# Altium PCB PCB_SATA_SFP.PcbDoc
Units mil, origin at the board's own origin, x right, y up, seen from the top; angles counter-clockwise.
Board outline 2874.02 x 708.66 mil, 4 copper layers (Top Layer, MidPlane_1, MidPlane_2, Bottom Layer), stack 61.899 mil thick; 37 components, 22 nets, 140 pads, 63 vias.
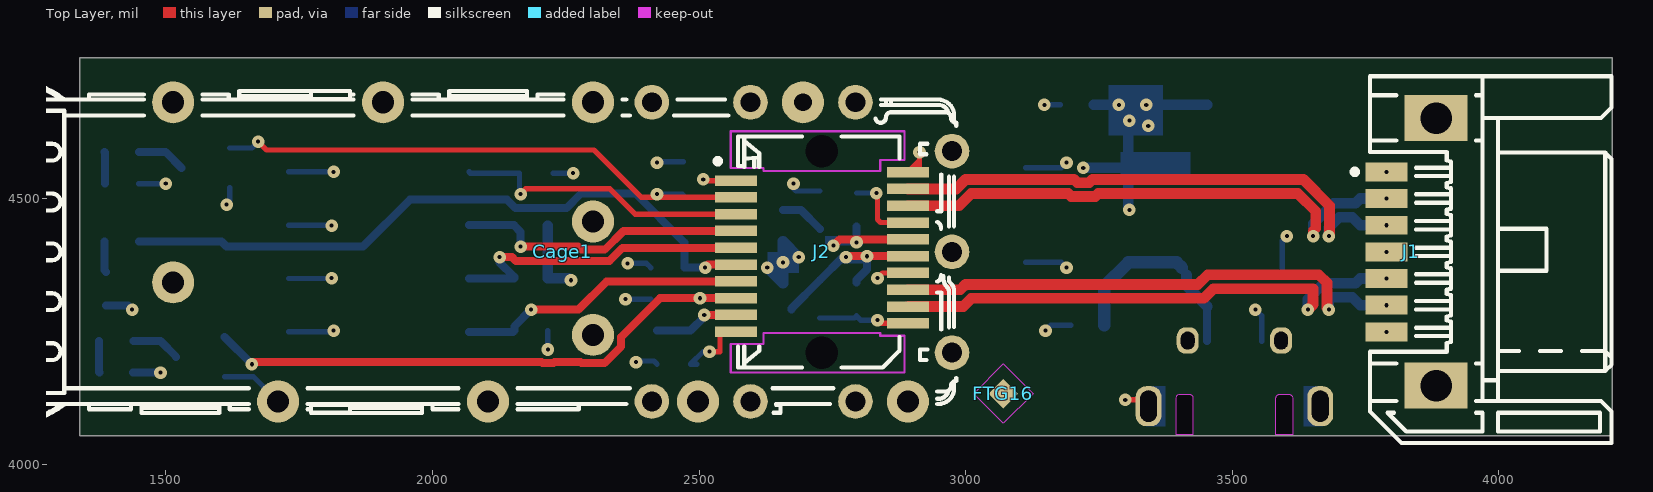
[diagram p0: Top Layer view]
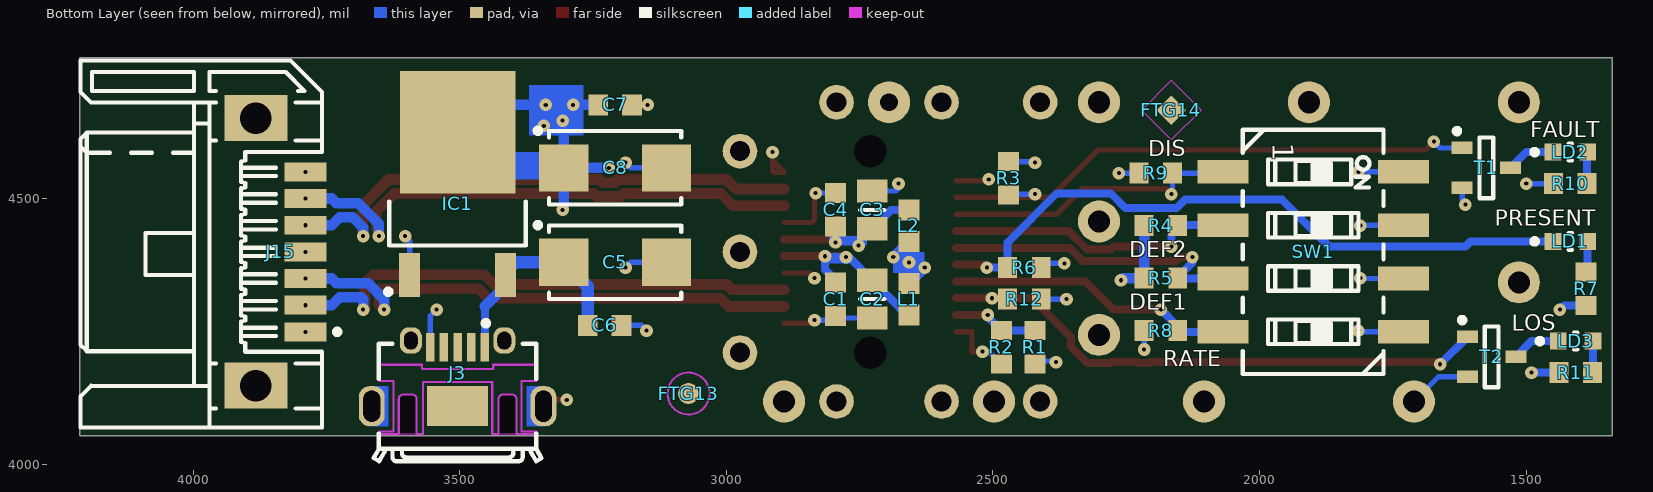
[diagram p1: Bottom Layer view, seen from below]
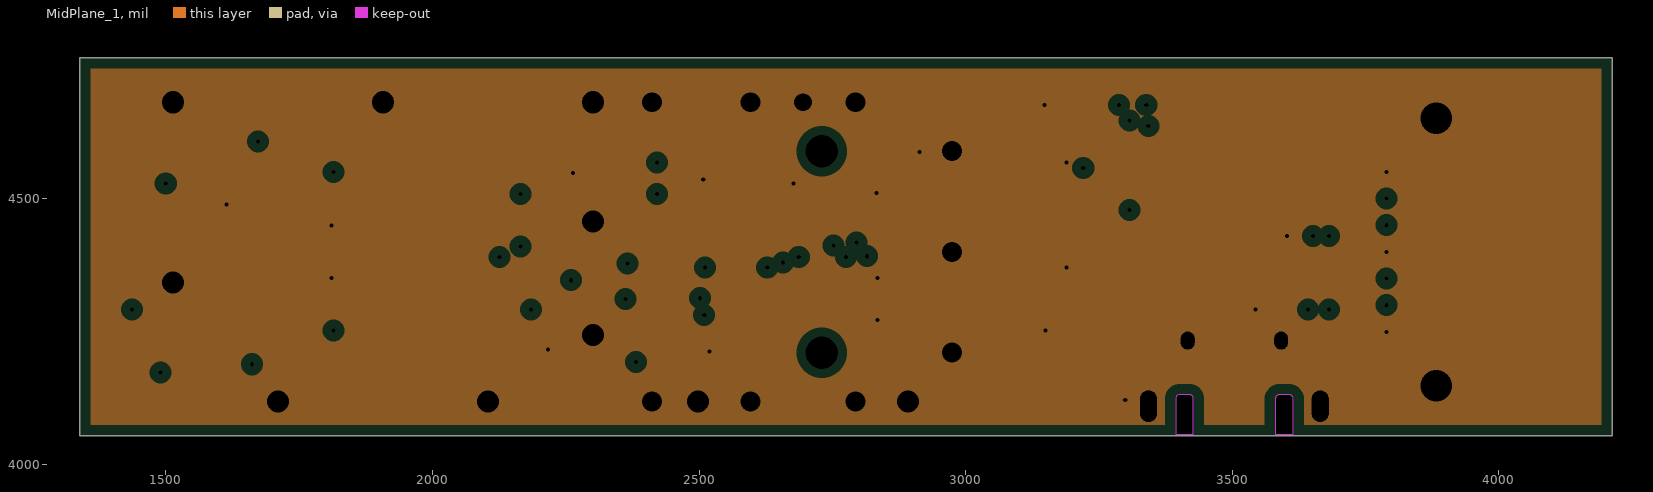
[diagram p2: MidPlane_1, clearances drawn from the general rule]
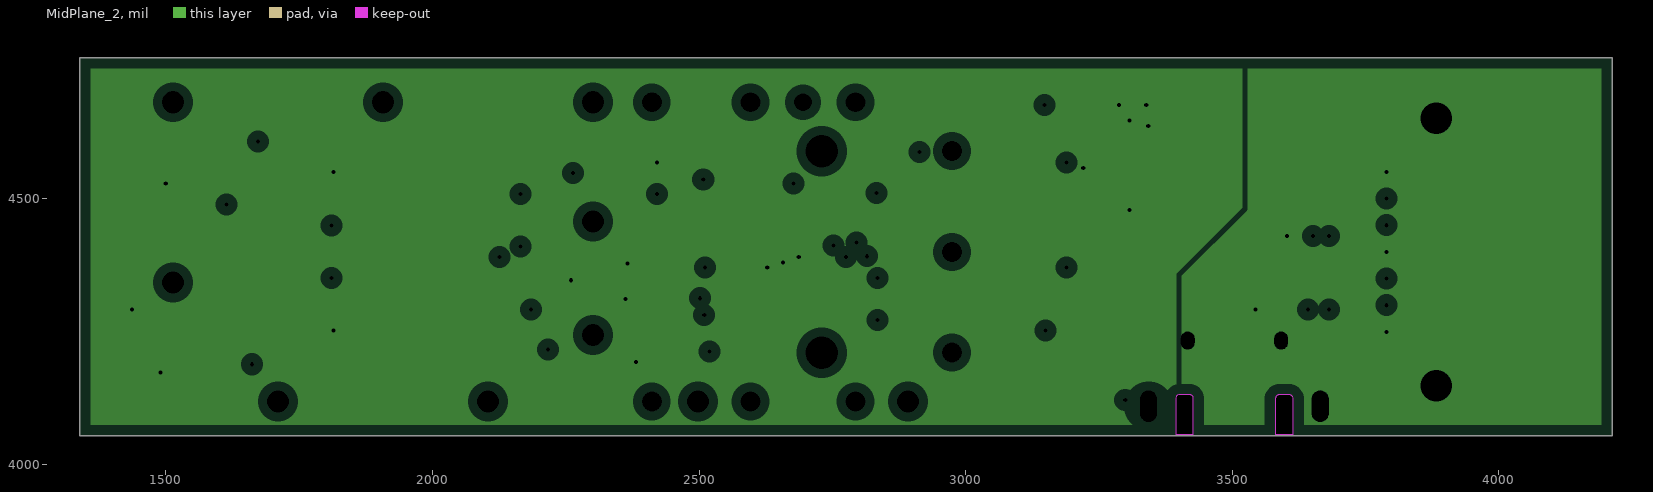
[diagram p3: MidPlane_2, clearances drawn from the general rule]
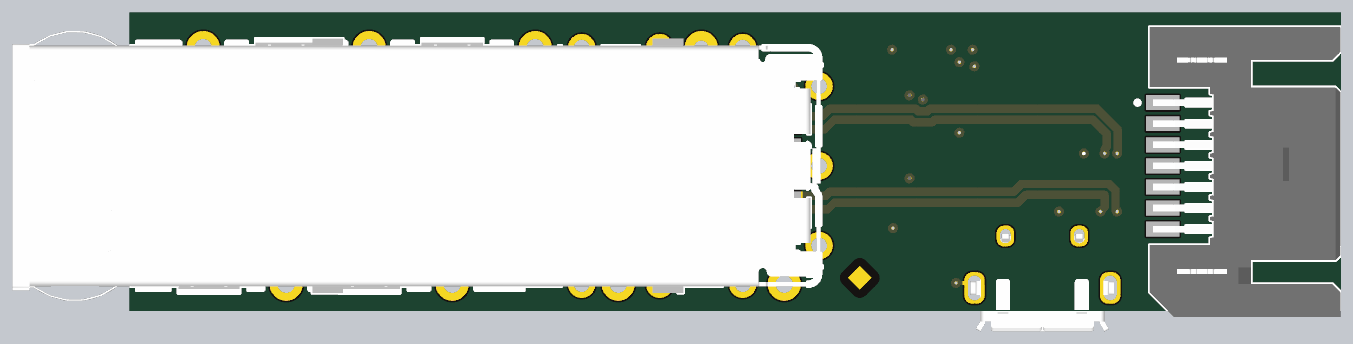
[diagram p4: 3D render of the assembled board from above, using the file's embedded part models]
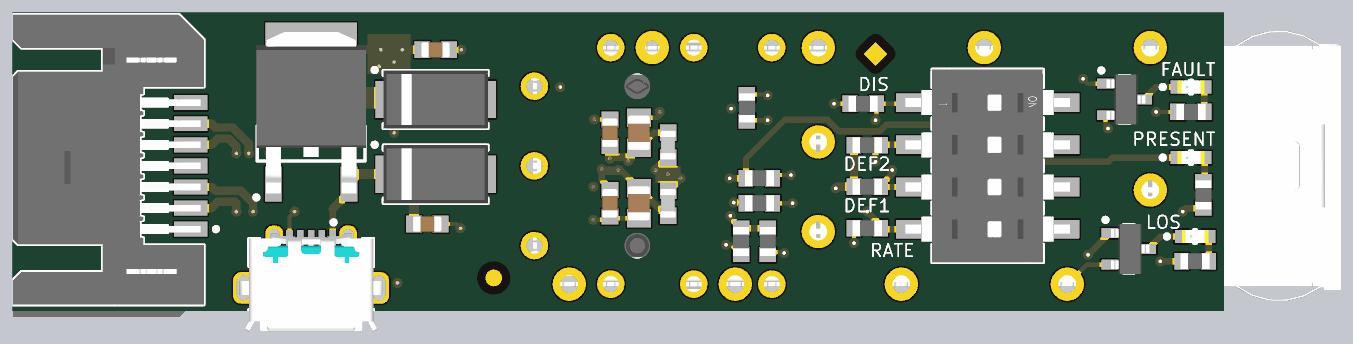
[diagram p5: 3D render of the assembled board from below, using the file's embedded part models]

## Layer stack, top to bottom
Top Solder: solder mask 0.4, Solder Resist, Dk 3.5
Top Layer: signal copper 1.4
Dielectric1: prepreg 14.1732, FR-4, Dk 4.8
MidPlane_1: plane copper 1.4, net GND
Dielectric3: core 27.9528, FR-4, Dk 4.8
MidPlane_2: plane copper 1.4, net (Multiple Nets)
Dielectric2: prepreg 14.1732, FR-4, Dk 4.8
Bottom Layer: signal copper 1.4
Bottom Solder: solder mask 0.4, Solder Resist, Dk 3.5

## Board outline
1338.58,4055.12 4212.6,4055.12 4212.6,4763.78 1338.58,4763.78

## Design rules (kind name [scope] priority, off if disabled: settings)
Clearance Clearance_KO [OnLayer('Keep-Out Layer')] p1: gap=10 ignorepadtopadclearanceinfootprint=FALSE except(0: Arc-Hole Track-Hole SMDPad-Hole THPad-Hole Via-Hole Fill-Hole Poly-Hole Region-Hole Text-Hole)
Clearance Clearance_Poly_DS [(InDifferentialPairClass('All Differential Pairs')) vs InPolygon] p2: gap=40 ignorepadtopadclearanceinfootprint=FALSE except(0: Arc-Hole Track-Hole SMDPad-Hole THPad-Hole Via-Hole Fill-Hole Poly-Hole Region-Hole Text-Hole)
Clearance Clearance_Poly [InPolygon] p3: gap=11.81 ignorepadtopadclearanceinfootprint=FALSE except(0: Arc-Hole Track-Hole SMDPad-Hole THPad-Hole Via-Hole Fill-Hole Poly-Hole Region-Hole Text-Hole)
Clearance [All] p4: gap=6 ignorepadtopadclearanceinfootprint=FALSE except(0: Arc-Hole Track-Hole SMDPad-Hole THPad-Hole Via-Hole Fill-Hole Poly-Hole Region-Hole Text-Hole; 15: Arc-Poly Track-Poly SMDPad-Poly THPad-Poly Via-Poly Fill-Poly Poly-Poly)
DiffPairsRouting [All] p1 off: maxlimit=6 minlimit=6 mostfreqgap=6 toplayer_minwidth=15 toplayer_maxwidth=15 toplayer_prefwidth=15 bottomlayer_minwidth=15 bottomlayer_maxwidth=15 bottomlayer_prefwidth=15 maxuncoupledlength=500
HoleSize [All] p1: absolutevalues=TRUE maxlimit=472.44 minlimit=1 maxpercent=80.000 minpercent=20.000
MinimumSolderMaskSliver [All] p1: minsoldermaskwidth=0
PlaneClearance [All] p1: clearance=16.73
PlaneConnect PlaneConnect_Via [IsVia] p1: planeconnectstyle=Direct reliefexpansion=20 reliefentries=4 reliefconductorwidth=10 reliefairgap=10
PlaneConnect [All] p2: planeconnectstyle=Relief reliefexpansion=10 reliefentries=4 reliefconductorwidth=10 reliefairgap=10
PolygonConnect PolygonConnect_Via [IsVia] p1: connectstyle=Direct reliefconductorwidth=10 reliefentries=4 polygonreliefangle="90 Angle" airgapwidth=10
PolygonConnect [All] p2: connectstyle=Relief reliefconductorwidth=10 reliefentries=4 polygonreliefangle="90 Angle" airgapwidth=10
RoomDefinition PCB_SATA_SFP [InComponentClass('PCB_SATA_SFP')] p1: confinementstyle=ConfineIn formatcopy=TRUE lockcomponents=FALSE outline -6375.21,3085.88 -4059.86,3085.88 -4059.86,3726.04 -6375.21,3726.04
RoutingVias [All] p1: holewidth=7.87 width=23.62 viastyle="Through Hole" minholewidth=7.87 minwidth=23.62 maxholewidth=23.62 maxwidth=47.24
SilkToSilkClearance [All] p1: silktosilkclearance=6
SilkToSolderMaskClearance SilkscreenOverComponentPads [IsPad] p1: minsilkscreentomaskgap=0 clearancetoexposedcopper=TRUE
SolderMaskExpansion [All] p1: expansion=4
Width Width_DS [(InDifferentialPairClass('All Differential Pairs'))] p1: maxlimit=12 minlimit=6 preferedwidth=12
Width [All] p2: maxlimit=23.54 minlimit=6 preferedwidth=23.54 minimp=50.000000 maximp=50.000000 favimp=50.000000
23 further rules are at their usual default settings.

## Classes and differential pairs
net class Diff_100Ohm: RD_N RD_P TD_N TD_P
differential pair TD: +TD_P -TD_N
differential pair RD: +RD_P -RD_N

## Components (designator, comment, footprint, x,y, rotation, side; value= is the part's Value field where it differs from the comment)
C1 "100nF" CAPC1608X87N 2795.28,4311.02 r90 bottom
C2 "10uF" CAPC2012X95N 2726.38,4311.02 r90 bottom
C3 "10uF" CAPC2012X95N 2726.38,4478.35 r270 bottom
C4 "100nF" CAPC1608X87N 2795.28,4478.35 r270 bottom
C5 "10uF" CAPMP6032X280N 3208.66,4379.92 r180 bottom
C6 "100nF" CAPC1608X87N 3228.35,4261.81 r0 bottom
C7 "100nF" CAPC1608X87N 3208.66,4675.2 r0 bottom
C8 "10uF" CAPMP6032X280N 3208.66,4557.09 r180 bottom
Cage1 "SFP+" TYCO_2007198-1 2730.31,4399.61 r0 top
FTG13 "Use only in PCB" FIDUCIAL_TOP_C100-200 3070.87,4133.86 r90 bottom
FTG14 "Use only in PCB" FIDUCIAL_TOP_S100-200 2165.35,4665.35 r90 bottom
FTG16 "Use only in PCB" FIDUCIAL_TOP_S100-200 3070.87,4133.86 r90 top
IC1 "LD1117DT33CTR" TO228P972X240-3N-R540X510 3503.94,4527.56 r90 bottom
J1 "SATA" 3M_5607-4200-SH 3789.37,4399.61 r90 top
J2 "SFP" TYCO_1367073-1 2730.31,4399.61 r0 top
J3 "Micro-USB AB 2.0" HIROSE_ZX62RD-AB-5P8 3503.94,4220.47 r180 bottom
J15 "SATA" 3M_5607-4200-SH 3789.37,4399.61 r270 bottom
L1 "120R@100MHz" INDC1608X65N 2657.48,4311.02 r270 bottom
L2 "120R@100MHz" INDC1608X65N 2657.48,4448.82 r90 bottom
LD1 "Green" LED_KINGBRIGHT_KPH-1608CGCK 1417.32,4419.29 r180 bottom
LD2 "Green" LED_KINGBRIGHT_KPH-1608CGCK 1417.32,4586.61 r180 bottom
LD3 "Green" LED_KINGBRIGHT_KPH-1608CGCK 1407.48,4232.28 r180 bottom
R1 "10k" RESC1608X55N 2421.26,4220.47 r270 bottom
R2 "0" RESC1608X55N 2484.25,4220.47 r90 bottom
R3 "10k" RESC1608X55N 2470.47,4537.4 r90 bottom
R4 "10k" RESC1608X55N 2185.04,4448.82 r0 bottom
R5 "10k" RESC1608X55N 2185.04,4350.39 r0 bottom
R6 "10k" RESC1608X55N 2440.94,4370.08 r180 bottom
R7 "240" RESC1608X55N 1387.8,4330.71 r270 bottom
R8 "10k" RESC1608X55N 2185.04,4251.97 r180 bottom
R9 "10k" RESC1608X55N 2194.88,4547.24 r180 bottom
R10 "240" RESC1608X55N 1417.32,4527.56 r0 bottom
R11 "240" RESC1608X55N 1407.48,4173.23 r0 bottom
R12 "10k" RESC1608X55N 2440.94,4311.02 r180 bottom
SW1 "Switch" SW_CTS_219-4MST 1899.61,4399.61 r180 bottom
T1 "BSH103" SOT95P230X110-3N 1574.8,4557.09 r180 bottom
T2 "BSH103" SOT95P230X110-3N 1564.96,4202.76 r180 bottom

## Footprints (in the part's own frame and the unit in brackets; to place one, negate y for a bottom-side part, rotate by r counter-clockwise, add the part's x,y. Pads: shape width x height; smd on the part's side, far side on the other; paste and mask are expansions set on the pad)
3M_5607-4200-SH [mm] "1.27mm (.050\") Pitch, Surface Mount, Right Angle, Serial ATA Plug (SATA)"
  rect 0.9x2 smd: 1(3.81,0) 2(2.54,0) 3(1.27,0) 4(0,0) 5(-1.27,0) 6(-2.54,0) 7(-3.81,0)
  rect 2.2x3 hole 1.5: 8(-6.37,-2.36) 8(6.37,-2.36)
  silkscreen extent -9.11,-10.71 8.36,1.64, body extent -9.11,-10.71 8.36,0.79, height 4
CAPC1608X87N [mm] "Chip Capacitor, Body 1.6x0.8mm IPC Medium Density"
  rect 0.95x1 smd: 1(-0.8,0) 2(0.8,0)
  body extent -0.87,-0.47 0.88,0.48, height 0.87
CAPC2012X95N [mm] "Chip Capacitor, Body 2.0x1.25mm, IPC Medium Density"
  rect 1.1x1.45 smd: 1(-0.9,0) 2(0.9,0)
  silkscreen extent 0,-0.58 0,0.58, body extent -1.05,-0.67 1.05,0.68, height 0.95
CAPMP6032X280N [mm] "Capacitor, Polarized, Molded  Body 6.0x3.2mm, IPC Medium Density"
  rect 2.35x2.25 smd: 1(-2.45,0) 2(2.45,0)
  silkscreen extent -3.8,-1.75 3.15,1.9, body extent -3.15,-1.75 3.15,1.75, height 2.8
FIDUCIAL_TOP_C100-200 [mm] "Round Fiducial Target, Top Layer, 1.0mm, Top Solder 2.0mm, Keepout =2.0mm"
  round 1 smd paste-0.51 mask+0.5: FTG2(0,0)
  Top Layer keep-out circle w0.1: c0,0 r1
FIDUCIAL_TOP_S100-200 [mm] "Square Fiducial Target, Top Layer, 1.0mm, Top Solder 2.0mm, Keepout =2.0mm"
  rect 1x1 smd rot 45 paste-0.51 mask+0.5: 1(0,0)
  Top Layer keep-out region: 1.414,0 0,-1.414 -1.414,0 0,1.414
HIROSE_ZX62RD-AB-5P8 [mm] "Right Angle, SMD Micro-USB Type AB - Reverse (Top mount), Shell Through Hole"
  rect 0.4x1.35 smd: 1(1.3,0) 2(0.65,0) 3(0,0) 4(-0.65,0) 5(-1.3,0)
  rrect80% 1.225x1.9 hole 0.8 slot 1.5 at 90 deg: 6(-4.088,-2.8) 6(4.088,-2.8)
  rrect80% 1.05x1.25 hole 0.65 slot 0.85 at 90 deg: 6(-2.225,0.325) 6(2.225,0.325)
  rect 2.9x1.9 smd: PastePad(0,-2.8)
  Top Layer region: 4.2,-3.75 4.2,-1.85 3.3,-1.85 3.3,-1.85 3.3,-3.75
  Top Layer region: -4.2,-1.85 -4.2,-3.75 -3.3,-3.75 -3.3,-3.75 -3.3,-1.85
  Top Layer keep-out lines w0.1: 3.75,-4.125 2.8,-4.125 2.8,-2.45 ccw(c2.6,-2.45) 2.6,-2.25 2.15,-2.25 ccw(c2.15,-2.45) 1.95,-2.45 1.95,-4.125 1.65,-4.125 1.65,-1.65 -1.65,-1.65 -1.65,-4.125 -1.95,-4.125 -1.95,-2.45 ccw(c-2.15,-2.45) -2.15,-2.25 -2.6,-2.25 ccw(c-2.6,-2.45) -2.8,-2.45 -2.8,-4.125 -3.75,-4.125 -3.75,-4 -3.05,-4 -3.05,-1.6 -3.75,-1.6 -3.75,-0.825 -1.7,-0.825 -1.7,-1.025 1.7,-1.025 1.7,-0.825 3.75,-0.825 3.75,-1.6 3.05,-1.6 3.05,-4 3.75,-4 3.75,-4.125
  Keep-Out Layer board cut-out: -2.8,-4.125 -2.8,-2.45 -2.785,-2.373 -2.741,-2.309 -2.676,-2.265 -2.6,-2.25 -2.6,-2.25 -2.15,-2.25 -2.073,-2.265 -2.009,-2.309 -1.965,-2.373 -1.95,-2.45 -1.95,-2.45 -1.95,-4.125
  Keep-Out Layer board cut-out: 1.95,-4.125 1.95,-2.45 1.965,-2.373 2.009,-2.309 2.074,-2.265 2.15,-2.25 2.15,-2.25 2.6,-2.25 2.677,-2.265 2.741,-2.309 2.785,-2.373 2.8,-2.45 2.8,-2.45 2.8,-4.125
  silkscreen extent -4,-5.42 4,1.27, body extent -4.32,-5.42 4.33,0.47, height 2.78
INDC1608X65N [mm] "Chip Inductor, 2-Leads, EIA 0603, Metric 1608, Body 1.6x0.8mm, IPC Medium Density"
  rect 1x1 smd: 1(-0.75,0) 2(0.75,0)
  body extent -0.87,-0.47 0.88,0.48, height 0.65
LED_KINGBRIGHT_KPH-1608CGCK [mm] "SMT Green LED, Case 0603, Body L 1.6 x W 0.8mm H 0.65mm"
  rect 0.8x0.8 smd: 1(-0.825,0) 2(0.825,0)
  silkscreen extent -1.83,-0.4 0.08,0.4, body extent -0.8,-0.4 0.8,0.4, height 0.65
RESC1608X55N [mm] "Chip Resistor, EIA 0603, Metric 1608, Body 1.6x0.8mm, IPC Medium Density"
  rect 0.9x1 smd: 1(-0.8,0) 2(0.8,0)
  body extent -0.87,-0.47 0.88,0.48, height 0.55
SOT95P230X110-3N [mm] "SOT23, 3 pin, Pitch 0.95mm - 1.3mm W X 2.9mm L X 1.1mm H, IPC Medium Density"
  rect 1x0.6 smd: 1(-1.15,0.95) 2(-1.15,-0.95) 3(1.15,0)
  silkscreen extent -1.53,-1.45 0.33,1.87, body extent -1.08,-1.5 1.25,1.5, height 1.1
SW_CTS_219-4MST [mm] "Pitch 2.54mm, Body 6.7 x 11.63mm, 4 Ways SPST Surface-Mounting DIP Switch, CTS 219 Series"
  rect 2.44x1.13 smd: 1(-4.3,3.81) 2(-4.3,1.27) 3(-4.3,-1.27) 4(-4.3,-3.81) 5(4.3,-3.81) 6(4.3,-1.27) 7(4.3,1.27) 8(4.3,3.81)
  silkscreen extent -3.35,-5.82 3.35,5.82, body extent -4.95,-5.81 4.96,5.82, height 4.3
TO228P972X240-3N-R540X510 [mm] "DPAK TO-252, 2.28mm pitch; 2 pin, 9.725mm L X 6.10mm W X 2.40mm H body, IPC Medium Density"
  rect 2.1x1 smd: 1(-4.35,2.28) 2(-4.35,-2.28)
  rect 5.85x5.5 smd: 3(2.45,0)
  silkscreen extent -5.27,-3.25 -0.85,3.43, body extent -4.9,-3.3 4.82,3.3, height 2.4
TYCO_1367073-1 [mm] "20 Position, Pitch 0.8mm SFP Receptacle (Small Form-factor Pluggable)"
  rect 2x0.5 smd: 1(-4.1,3.395) 2(-4.1,2.595) 3(-4.1,1.795) 4(-4.1,0.995) 5(-4.1,0.195) 6(-4.1,-0.605) 7(-4.1,-1.405) 8(-4.1,-2.205) 9(-4.1,-3.005) 10(-4.1,-3.805) 11(4.1,-3.405) 12(4.1,-2.605) 13(4.1,-1.805) 14(4.1,-1.005) 15(4.1,-0.205) 16(4.1,0.595) 17(4.1,1.395) 18(4.1,2.195) 19(4.1,2.995) 20(4.1,3.795)
  round 0.5 hole 1.55 unplated mask+0.525: MTG1(0,4.795) MTG2(0,-4.805)
  Top Layer keep-out lines w0.1: -4.34,-5.755 -4.34,-4.395 -2.78,-4.395 -2.78,-3.855 2.78,-3.855 2.78,-3.995 3.94,-3.995 3.94,-4.805 3.94,-5.755 -4.34,-5.755 ; -4.34,3.985 -4.34,5.745 3.94,5.745 3.94,4.385 2.78,4.385 2.78,3.845 -2.78,3.845 -2.78,3.985 -4.34,3.985
  silkscreen extent -5.08,-5.51 3.7,5.5, body extent -4.5,-5.5 4.5,5.5, height 5.22
TYCO_2007198-1 [mm] "SFP+ 1x1 Press Fit Cage"
  round 2 hole 1.05: 1(-30.9,7.125) 2(-20.9,7.125) 3(-10.9,7.125) 4(-10.9,1.445) 5(-30.9,-1.455) 6(-10.9,-3.955) 7(-25.9,-7.125) 8(-15.9,-7.125) 9(-5.9,-7.125) 10(4.1,-7.125)
  round 1.65 hole 0.95: 11(-8.1,7.125) 12(-3.4,7.125) 13(1.6,7.125) 14(6.2,4.8) 15(6.2,0) 16(6.2,-4.8) 17(-8.1,-7.125) 18(-3.4,-7.125) 19(1.6,-7.125)
  round 2 hole 0.85: 20(-0.9,7.125)
  silkscreen extent -42.4,-8.15 6.4,8.15, body extent -42.4,-8.15 6.4,8.15, height 10.6

## Part data
C1 C4 C6 C7: library part CC0603_100NF_50V_10%_X5R, "Non-polarised capacitor", Case=0603, Manufacturer=GENERIC, Manufacturer1 ComponentHeight=0.9mm, Manufacturer1 Example=TDK, Manufacturer1 Part Number=C1608X5R1H104K080AA, Tolerance=±10%, Voltage=50V, Author="CERN DEM MR", Component Type=Standard, CreateDate=08.01.2016, HelpURL=\\cern.ch\dfs\Applications\Altium\Datasheets\CC0603_X5R_TDK_C.pdf, LatestRevisionDate=08.01.2016, Manufacturer Part Number=CC0603_100NF_50V_10%_X5R, Mounted=Yes, Part Description="SMD Multilayer Chip Ceramic Capacitor", Part Number=CC0603_100NF_50V_10%_X5R, Pin Count=2, Sense=No, SMD=Yes, Socket=No, Status=None, TC=X5R
C2 C3: library part CC0805_10UF_25V_10%_X5R, "Non-polarised capacitor", Case=0805, Manufacturer=GENERIC, Manufacturer1 ComponentHeight=0.95mm, Manufacturer1 Example=MURATA, Manufacturer1 Part Number=GRM219R61E106KA12D, Tolerance=±10%, Voltage=25V, Author="CERN DEM JLC", Component Type=Standard, CreateDate=25.10.2012, HelpURL=\\cern.ch\dfs\Applications\Altium\Datasheets\CC0805_X5R_MURATA_GRM.pdf, LatestRevisionDate=06.09.2016, Manufacturer Part Number=CC0805_10UF_25V_10%_X5R, Mounted=Yes, Part Description="SMD Multilayer Chip Ceramic Capacitor", Part Number=CC0805_10UF_25V_10%_X5R, Pin Count=2, Sense=No, SMD=Yes, Socket=No, Status=Preferred, TC=X5R
C5 C8: library part CTE6032-28_10UF_25V_10%_LESR0300, "Polarised capacitor", Case=C, Manufacturer=GENERIC, Manufacturer1 ComponentHeight=2.8mm, Manufacturer1 Example="VISHAY SPRAGUE", Manufacturer1 Part Number=TR3C106K025C0300, Tolerance=±10%, Voltage=25V, Author="CERN DEM JLC", Component Type=Standard, CreateDate=30.08.2011, HelpURL=\\cern.ch\dfs\Applications\Altium\Datasheets\CTE_VISHAY_TR3.pdf, LatestRevisionDate=30.08.2011, Manufacturer Part Number=CTE6032-28_10UF_25V_10%_LESR0300, Mounted=Yes, Part Description="Low ESR 0R3 Solid Tantalum Chip Capacitor", Part Number=CTE6032-28_10UF_25V_10%_LESR0300, Pin Count=2, Sense=No, SMD=Yes, Socket=No, Status=Preferred
Cage1: library part TYCO_2007198-1, "SFP+ 1x1 Cage (20Pins)", Manufacturer="TYCO ELECTRONICS", Manufacturer Part Number=2007198-1, Author="CERN DEM JLC", ClassName=Connectors, ComponentHeight=9.7mm, Component Type=Standard, CreateDate=04.06.2013, Family=SFP+, HelpURL=\\cern.ch\dfs\Applications\Altium\Datasheets\TYCO_2007198-1.pdf, LatestRevisionDate=12.06.2013, Mounted=Yes, Part Description="1x1 Press Fit Cage For Use with SFP+ Connector (Small Form-factor Pluggable)", Part Number=TYCO_2007198-1, Pin Count=20, PressFit=Yes, Sense=No, SMD=No, Socket=No, Status=None
FTG13: library part FIDUCIAL_TARGET_C100-200, "Fiducial Target", Author="CERN DEM JLC", ComponentHeight=0mm, Component Type="Standard (No BOM)", CreateDate=09.02.2010, Family=Fiducial, HelpURL=Undefined, LatestRevisionDate=04.04.2012, Mounted=No, PackageDescription="Round Fiducial Target, Top Layer, 1.0mm, Top Solder 2.0mm, Keepout =2.0mm", Part Description="Round Fiducial Target, Top Layer, 1.0mm, Top Solder 2.0mm, Keepout =2.0mm", Part Number=FIDUCIAL_TARGET_C100-200, Pin Count=1, Sense=No, SMD=Yes, Socket=No, Status=None
FTG14 FTG16: library part FIDUCIAL_TARGET_S100-200, "Fiducial Target", Author="CERN DEM JLC", ComponentHeight=0mm, Component Type="Standard (No BOM)", CreateDate=09.02.2010, Family=Fiducial, HelpURL=Undefined, LatestRevisionDate=04.04.2012, Mounted=No, PackageDescription="Square Fiducial Target, Top Layer, 1.0mm, Top Solder 2.0mm, Keepout =2.0mm", Part Description="Square Fiducial Target, Top Layer, 1.0mm, Top Solder 2.0mm, Keepout =2.0mm", Part Number=FIDUCIAL_TARGET_S100-200, Pin Count=1, Sense=No, SMD=Yes, Socket=No, Status=None
IC1: "3-Terminal Regulator 1=GND 2=IN 3=OUT", Case=DPAK, Manufacturer="ST MICROELECTRONICS", Author="CERN DEM JLC", Bonding=No, ComponentHeight=2.4mm, Component Type=Standard, CreateDate=08.06.2011, Device=LD1117DT33CTR, HelpURL=\\cern.ch\dfs\Applications\Altium\Datasheets\LD1117DT33CTR.pdf, LatestRevisionDate=08.06.2011, Manufacturer Part Number=LD1117DT33CTR, Mounted=Yes, PackageDescription="DPAK TO-252, 2.28mm pitch; 2 pin, 9.725mm L X 6.10mm W X 2.40mm H body, IPC Medium Density", Part Description="3.3V 800mA Low drop fixed and adjustable positive voltage regulators", Part Number=LD1117DT33CTR, Pin Count=3, PressFit=No, Sense=No, SMD=Yes, Socket=No
J1 J15: library part 3M_5607-4200-SH, "7 Pin + 1 Shield SATA Receptacle", Manufacturer=3M, Manufacturer Part Number=5607-4200-SH, Author="CERN DEM JLC", ComponentHeight=4mm, Component Type=Standard, CreateDate=14.02.2011, Family=SATA, HelpURL=\\cern.ch\dfs\Applications\Altium\Datasheets\3M_5607-4200-SH.pdf, LatestRevisionDate=31.05.2011, Mounted=Yes, Part Description="Signal Plug, Surfacemount, Right Angle,  Serial Advanced Technology Attachment (SATA) Connector, 5607 Series", Part Number=3M_5607-4200-SH, Pin Count=8, PressFit=No, Sense=No, SMD=Yes, Socket=No, Status=None
J2: library part TYCO_1367073-1, "20 Position SFP  Connector (Small Form-factor Pluggable)", Manufacturer="TYCO ELECTRONICS", Manufacturer Part Number=1367073-1, Author="CERN DEM JLC", ComponentHeight=5.4mm, ComponentLink1Description=Application, ComponentLink1URL=\\cern.ch\dfs\Applications\Altium\Datasheets\TYCO_SFP_Application.pdf, ComponentLink2Description="SFP Specification", ComponentLink2URL=\\cern.ch\dfs\Applications\Altium\Datasheets\Tyco_SFP_Specification.pdf, Component Type=Standard, CreateDate=25.01.2010, Family=SFP, HelpURL=\\cern.ch\dfs\Applications\Altium\Datasheets\TYCO_1367073-1.pdf, LatestRevisionDate=25.01.2010, Mounted=Yes, Part Description="20 Position, Pitch 0.8mm SFP Receptacle (Small Form-factor Pluggable)", Part Number=TYCO_1367073-1, Pin Count=20, PressFit=No, Sense=No, SMD=Yes, Socket=No, Status=None
J3: library part HIROSE_ZX62RD-AB-5P8, "5 Pin + 1 Shield USB Receptacle", Manufacturer="HIROSE (HRS)", Manufacturer Part Number=ZX62RD-AB-5P8, Author="CERN DEM JLC", ClassName=Connectors, ComponentHeight=2.35mm, ComponentLink1Description=Package-Drawing, ComponentLink1URL=\\cern.ch\dfs\Applications\Altium\Datasheets\HIROSE_ZX62RD-AB-5P8_Package-Drawing.pdf, Component Type=Standard, CreateDate=29.10.2014, Family="Micro-USB AB 2.0", HelpURL=\\cern.ch\dfs\Applications\Altium\Datasheets\HIROSE_ZX62RD-AB-5P8.pdf, LatestRevisionDate=29.10.2014, Mounted=Yes, Part Description="Micro-USB 2.0 Right Angle, SMD Type AB - Reverse (Top mount), Shell Through Hole", Part Number=HIROSE_ZX62RD-AB-5P8, Pin Count=7, PressFit=No, Sense=No, SMD=Yes, Socket=No, Status=None
L1 L2: library part IND0603_MURATA_BLM18SG121TN1D, "Inductor", Case=0603, Manufacturer=MURATA, Manufacturer Part Number=BLM18SG121TN1D, Power=3A, Resistance=0.025R, Tolerance=±25%, Author="CERN DEM JLC", ComponentHeight=0.65mm, Component Type=Standard, CreateDate=23.07.2014, HelpURL=\\cern.ch\dfs\Applications\Altium\Datasheets\IND0603_MURATA_BLM18S.pdf, LatestRevisionDate=23.07.2014, Mounted=Yes, Part Description="SMD EMIFIL Suppression Chip Ferrite Bead", Part Number=IND0603_MURATA_BLM18SG121TN1D, Pin Count=2, Sense=No, SMD=Yes, Socket=No, Status=None
LD1 LD2 LD3: library part LED_KINGBRIGHT_KPH-1608CGCK, "LED Green 1C 2A", Manufacturer=KINGBRIGHT, Manufacturer Part Number=KPH-1608CGCK, Author="CERN DEM JLC", Bonding=No, Color=Green, ComponentHeight=0.65mm, Component Type=Standard, CreateDate=03.07.2017, HelpURL=\\cern.ch\dfs\Applications\Altium\Datasheets\LED_KINGBRIGHT_KPH-1608CGCK.pdf, LatestRevisionDate=03.07.2017, Mounted=Yes, PackageDescription="SMT Green LED, Case 0603, Body L 1.6 x W 0.8mm H 0.65mm", Part Description="SMD Green LED, Case 1.6mmX0.8mm(0603), 0.65mm Thickness", Part Number=LED_KINGBRIGHT_KPH-1608CGCK, Pin Count=2, PressFit=No, Sense=No, SMD=Yes, Socket=No
R1 R3 R4 R5 R6 R8 R9 R12: library part R0603_10K_1%_0.1W_100PPM, "Resistor - 1%", Case=0603, Manufacturer=GENERIC, Manufacturer1 ComponentHeight=0.55mm, Manufacturer1 Example="NIC COMPONENT", Manufacturer1 Part Number=NRC06F1002TRF, Power=0.1W, Tolerance=±1%, Author="CERN DEM JLC", Component Type=Standard, CreateDate=03.12.2007, HelpURL=\\cern.ch\dfs\Applications\Altium\Datasheets\R0603_NIC_NRC.pdf, LatestRevisionDate=13.03.2008, Manufacturer Part Number=R0603_10K_1%_0.1W_100PPM, Mounted=Yes, Part Description="General Purpose Thick Film Chip Resistor", Part Number=R0603_10K_1%_0.1W_100PPM, Pin Count=2, PressFit=No, Sense=No, SMD=Yes, Socket=No, Status=Preferred, TC=±100ppm/°C
R2: library part R0603_0R_JUMPER, "Resistor", Case=0603, Manufacturer=GENERIC, Manufacturer1 ComponentHeight=0.55mm, Manufacturer1 Example="NIC COMPONENT", Manufacturer1 Part Number=NRC06Z0, Author="CERN DEM JLC", Component Type=Standard, CreateDate=03.12.2007, HelpURL=\\cern.ch\dfs\Applications\Altium\Datasheets\R0603_NIC_NRC.pdf, LatestRevisionDate=13.03.2008, Manufacturer Part Number=R0603_0R_JUMPER, Mounted=Yes, Part Description="1A (0.05R Max DC Resistance) Zero Ohm Jumper", Part Number=R0603_0R_JUMPER, Pin Count=2, PressFit=No, Sense=No, SMD=Yes, Socket=No, Status=Preferred
R7 R10 R11: library part R0603_240R_1%_0.1W_100PPM, "Resistor - 1%", Case=0603, Manufacturer=GENERIC, Manufacturer1 ComponentHeight=0.55mm, Manufacturer1 Example="NIC COMPONENT", Manufacturer1 Part Number=NRC06F2400TRF, Power=0.1W, Tolerance=±1%, Author="CERN DEM JLC", Component Type=Standard, CreateDate=03.12.2007, HelpURL=\\cern.ch\dfs\Applications\Altium\Datasheets\R0603_NIC_NRC.pdf, LatestRevisionDate=13.03.2008, Manufacturer Part Number=R0603_240R_1%_0.1W_100PPM, Mounted=Yes, Part Description="General Purpose Thick Film Chip Resistor", Part Number=R0603_240R_1%_0.1W_100PPM, Pin Count=2, PressFit=No, Sense=No, SMD=Yes, Socket=No, Status=Preferred, TC=±100ppm/°C
SW1: library part SW_CTS_219-4MST, "4 Ways SPST DIP Switch", Manufacturer="CTS ELECTROCOMPONENTS", Manufacturer Part Number=219-4MST, Author="CERN DEM JLC", ComponentHeight=2.23mm, Component Type=Standard, CreateDate=17.11.2014, Family=Switch, HelpURL=\\cern.ch\dfs\Applications\Altium\Datasheets\SW_CTS_219-4MST.pdf, LatestRevisionDate=17.11.2014, Mounted=Yes, PackageDescription="Pitch 2.54mm, Body 6.7 x 11.63mm, 4 Ways SPST Surface-Mounting DIP Switch, CTS 219 Series", Part Description="4 Ways, Pitch 2.54mm, SPST DIP Switch, Rating 100mA 50VDC", Part Number=SW_CTS_219-4MST, Pin Count=8, PressFit=No, Sense=No, SMD=Yes, Socket=No, Status=None
T1 T2: "N-CHANNEL MOSFET WITH DIODE", Case=SOT23-3, Manufacturer=NEXPERIA, Author="CERN DEM JLC", Bonding=No, ComponentHeight=1.1mm, Component Type=Standard, CreateDate=16.03.2010, Device=BSH103, HelpURL=\\cern.ch\dfs\Applications\Altium\Datasheets\BSH103.pdf, LatestRevisionDate=20.06.2017, Manufacturer Part Number=BSH103, Mounted=Yes, PackageDescription="SOT23, 3 pin, Pitch 0.95mm - 1.3mm W X 2.9mm L X 1.1mm H, IPC Medium Density", Part Description="30V 850mA N-Channel Enhancement Mode Field-Effect Transistor", Part Number=BSH103, Pin Count=3, PressFit=No, Sense=No, SMD=Yes, Socket=No

## Via types
v1: diameter 23.62, hole 7.87, Top Layer to Bottom Layer, tented both sides, 63 vias

## Nets (pads, with @x,y where several pads share a name; then routed paths per layer and width w, separated by ;. In a path a pad name is that pad's centre, name@x,y a point inside that pad or via, vN(x,y) a via of type N, cw(c..) or ccw(c..) an arc to the next point about the centre after c; other vN are vias at no path point)
_TX_FAULT: J2.2 R3.1 T1.1 | length 1047
  Top Layer w10: v1(1673.23,4606.3) 1688.98,4590.55 2303.15,4590.55 2391.93,4501.77 J2.2
  Bottom Layer w10: T1.1 1661.42,4594.49 v1(1673.23,4606.3) ; v1(2421.26,4507.87) 2468.5,4507.87 R3.1
GND: C1.1 C2.1 C3.1 C4.1 C5.2 C6.1 C7.1 C8.2 Cage1.1 Cage1.2 Cage1.3 Cage1.4 Cage1.5 Cage1.6 Cage1.7 Cage1.8 Cage1.9 Cage1.10 Cage1.11 Cage1.12 Cage1.13 Cage1.14 Cage1.15 Cage1.16 Cage1.17 Cage1.18 Cage1.19 Cage1.20 IC1.1 J1.1 J1.4 J1.7 J1.8 J2.1 J2.10 J2.11 J2.14 J2.17 J2.20 J3.5 J3.6 J15.1 J15.4 J15.7 J15.8 R2.1 R8.1 R9.1 SW1.6 SW1.7 T1.2 T2.2 | length 1550.4
  Top Layer w10: v1(2507.87,4535.43) 2510.04,4533.27 J2.1 ; v1(2519.68,4212.59) 2539.36,4212.59 2539.37,4249.8 J2.10 ; v1(2832.68,4509.84) 2834.65,4507.87 2834.65,4460.24 2840.35,4454.53 J2.17 ; v1(2834.65,4271.65) 2840.75,4265.55 J2.11 ; v1(2834.65,4350.39) 2844.29,4360.04 J2.14 ; v1(2913.38,4586.61) 2913.38,4570.66 ; v1(3299.21,4122.05) J3.6@3343.01,4122.05 ; 2913.38,4570.66 2913.38,4551.18 2911.22,4549.02 J2.20 2913.38,4570.66
  Bottom Layer w10: T2.2 1664.37,4165.35 Cage1.7 ; v1(1614.17,4488.19) 1620.08,4494.09 T1.2 ; SW1.6 1810.24,4349.61 v1(1811.02,4350.39) ; SW1.7 1810.24,4449.61 v1(1811.02,4448.82) ; v1(2216.54,4216.54) R8.1 ; R9.1 v1(2263.78,4547.24) ; R2.1@2496.07,4188.98 R2.1 2507.87,4212.59 v1(2519.68,4212.59) ; v1(2677.16,4527.55) 2677.16,4518.53 2681.91,4513.78 C3.1 ; C2.1 2791.34,4275.59 C1.1 2803.15,4271.65 v1(2834.65,4271.65) ; C4.1 v1(2832.68,4509.84) ; C5.2 3179.13,4379.92 v1(3188.98,4370.08) ; C8.2 3179.13,4557.09 v1(3188.98,4566.93) ; v1(3147.64,4675.2) C7.1 ; v1(3149.61,4251.97) 3159.45,4261.81 C6.1 ; v1(3543.31,4291.34) 3555.12,4279.53 J3.5@3555.12,4232.28 ; IC1.1 3593.7,4420.47 v1(3602.36,4429.13)
  other v1: 3789.37,4249.61 3789.37,4399.6 3789.37,4549.61
LOS: J2.8 R12.1 T2.1 | length 1044.7
  Top Layer w15: v1(1661.53,4188.86) 1665.58,4192.91 2204.36,4192.91 2206.05,4191.22 2227.02,4191.22 2228.71,4192.91 2277.39,4192.91 2279.28,4191.03 2323.08,4191.03 2354.05,4222 2354.05,4239.88 2426.96,4312.8 v1(2501.77,4312.8) J2.8
  Bottom Layer w15: T2.1 v1(1661.53,4188.86)
MOD_DEF1: J2.5 R5.1 SW1.3 | length 594.3
  Top Layer w15: v1(2125.98,4389.76) 2149.24,4389.76 2156.38,4382.63 2331.78,4382.63 2356.43,4407.28 J2.5
  Bottom Layer w15: SW1.3 2152.76,4349.61 R5.1@2152.76,4353.15 ; v1(2125.98,4389.76) 2125.98,4379.92 R5.1@2152.76,4353.15 ; R5.1 2153.54,4352.36 R5.1@2152.76,4353.15
MOD_DEF2: J2.4 R4.1 SW1.2 | length 549.7
  Top Layer w15: v1(2165.35,4409.45) 2273.46,4409.45 2279.28,4403.63 2323.08,4403.63 2358.23,4438.78 J2.4
  Bottom Layer w15: SW1.2 2152.76,4449.61 R4.1 2165.35,4437.01 v1(2165.35,4409.45)
MOD_PRESENT: J2.6 LD1.1 R6.1 | length 1265
  Top Layer w15: v1(2511.42,4370.08) 2517.13,4375.79 J2.6
  Bottom Layer w15: LD1.1 1604.33,4419.29 1614.17,4409.45 1870.08,4409.45 1958.02,4497.39 2140.04,4497.39 2155.43,4482 2251.92,4482 2279.28,4509.37 2380.4,4509.37 2472.44,4417.32 R6.1 v1(2511.42,4370.08)
NetC1_2: C1.2 C2.2 J2.15 L1.2 | length 318.3
  Top Layer w15: v1(2775.59,4389.76) 2777.36,4391.54 v1(2814.96,4391.54) J2.15
  Bottom Layer w15: L1.2@2673.23,4291.34 2673.23,4293.31 C2.2 2769.69,4389.76 v1(2775.59,4389.76) ; C1.2 2795.28,4346.82 2814.96,4366.5 v1(2814.96,4391.54)
NetC3_2: C3.2 C4.2 J2.16 L2.2 | length 257.7
  Top Layer w15: v1(2751.97,4411.42) 2763.58,4423.03 J2.16
  Bottom Layer w15: L2.2 2690.94,4478.35 C3.2 ; v1(2795.28,4417.32) C4.2
NetC5_1: C5.1 C6.2 IC1.2 J3.1 | length 381.3
  Bottom Layer w15: J3.1@3452.76,4232.28 3452.76,4297.24
  Bottom Layer w20: IC1.2 3414.17,4335.83 3452.76,4297.24
  Bottom Layer w23.54: C6.2 3259.84,4334.65 C5.1 3395.67,4379.92 IC1.2@3405.51,4370.08
NetJ2_9: J2.9 R1.1 R2.2 | length 162.1
  Top Layer w15: v1(2509.65,4281.3) J2.9
  Bottom Layer w15: R1.1 R2.2 2509.65,4277.36 v1(2509.65,4281.3)
NetLD1_2: LD1.2 R7.1 | length 58.3
  Bottom Layer w15: LD1.2 1384.84,4365.16 R7.1
NetLD2_1: LD2.1 T1.3 | length 92
  Bottom Layer w15: LD2.1 1500,4586.61 T1.3
NetLD2_2: LD2.2 R10.1 | length 59.5
  Bottom Layer w15: LD2.2 1385.83,4585.63 R10.1
NetLD3_1: LD3.1 T2.3 | length 92
  Bottom Layer w15: LD3.1 1490.16,4232.28 T2.3
NetLD3_2: LD3.2 R11.1 | length 59.5
  Bottom Layer w15: LD3.2 1375,4174.21 R11.1
P3V3: C7.2 C8.1 IC1.3 L1.1 L2.1 R1.2 R3.2 R4.2 R5.2 R6.2 R7.2 R10.2 R11.2 R12.2 SW1.5 SW1.8 | length 1235.8
  Bottom Layer w10: R10.2 v1(1500,4527.56) ; SW1.5 1812.4,4249.61 v1(1814.76,4251.97) ; SW1.8 v1(1814.76,4549.61) ; v1(2362.2,4311.02) R12.2 ; v1(2366.14,4377.95) 2401.57,4377.95 R6.2 ; v1(2381.89,4192.91) 2379.92,4194.88 2415.35,4194.88 R1.2 ; v1(2421.26,4566.93) 2423.23,4568.9 R3.2
  Bottom Layer w15: R7.2 1429.13,4299.21 v1(1437.01,4291.34) ; R11.2 v1(1490.16,4173.23)
  Bottom Layer w20: R4.2 R5.2 2255.91,4350.39 v1(2259.84,4346.46) ; v1(2627.95,4370.08) L1.1 v1(2657.48,4379.92) L2.1 v1(2687.01,4389.76) ; v1(3220.47,4557.09) C8.1 ; C7.2 v1(3287.4,4675.2) ; v1(3307.09,4478.35) 3305.12,4480.31 C8.1 ; v1(3307.09,4645.67) 3305.12,4643.7 C8.1 ; v1(3338.58,4675.2) IC1.3@3452.76,4675.2
  other v1: 3342.52,4635.83
RATE_SEL: J2.7 R8.2 SW1.4 | length 543.8
  Top Layer w15: v1(2185.04,4291.34) 2273.85,4291.34 2326.8,4344.29 J2.7
  Bottom Layer w15: SW1.4 2151.18,4249.61 R8.2 2153.54,4259.84 v1(2185.04,4291.34)
RD_N: J1.5 J2.12 J15.3 | length 1000.3
  Top Layer w20: J2.12 2995.23,4297.05 3010.51,4312.32 3446.18,4312.32 3464.57,4330.71 3651.41,4330.71 3651.41,4301.02 v1(3641.73,4291.34)
  Bottom Layer w20: v1(3641.73,4291.34) 3641.73,4310.98 3671.35,4340.61 3731,4340.61 3740,4349.61 v1(3789.37,4349.61)
RD_P: J1.6 J2.13 J15.2 | length 991
  Top Layer w20: J2.13 2989.96,4328.54 2999.74,4338.32 3435.41,4338.32 3453.8,4356.71 3662.18,4356.71 3677.41,4341.48 3677.41,4295.01 v1(3681.1,4291.33)
  Bottom Layer w20: v1(3681.1,4291.33) 3681.1,4311.02 3684.69,4314.61 3725,4314.61 3740,4299.61 v1(3789.37,4299.61)
TD_N: J1.3 J2.19 J15.5 | length 1019.1
  Top Layer w20: J2.19 2982.09,4517.52 2999.74,4535.17 3203.05,4535.17 3208.95,4529.28 3231.99,4529.28 3237.89,4535.17 3633.49,4535.17 3682.29,4486.37 3682.29,4430.32 v1(3681.1,4429.13)
  Bottom Layer w20: v1(3681.1,4429.13) 3681.1,4444.92 3700.79,4464.61 3725,4464.61 3740,4449.61 v1(3789.37,4449.61)
TD_P: J1.2 J2.18 J15.6 | length 1021.9
  Top Layer w20: J2.18 2987.36,4486.02 3010.51,4509.17 3192.28,4509.17 3198.18,4503.28 3242.76,4503.28 3248.66,4509.17 3622.72,4509.17 3656.29,4475.6 3656.29,4443.65 3651.48,4438.84 v1(3651.48,4429.13)
  Bottom Layer w20: v1(3651.48,4429.13) 3651.48,4452.07 3690.02,4490.61 3731,4490.61 3740,4499.61 v1(3789.37,4499.61)
TX_DIS: J2.3 R9.2 SW1.1 | length 562.9
  Top Layer w10: v1(2165.35,4507.87) 2175.2,4517.72 2332.68,4517.72 2380.12,4470.28 J2.3
  Bottom Layer w10: SW1.1 2071.26,4547.24 R9.2 2163.39,4509.84 v1(2165.35,4507.87)
pads on no net: FTG13.FTG2 FTG14.1 FTG16.1 J2.MTG1 J2.MTG2 J3.2 J3.3 J3.4 J3.PastePad
copper on no net: | length 103920.8
  Top Layer w1: 4589.45,2292.6 4689.13,2392.28 4809.13,2512.28 4929.13,2632.28 5049.13,2752.28 5169.13,2872.28 5289.13,2992.28 5409.13,3112.28 5529.13,3232.28 5649.13,3352.28 5709.13,3412.28 ; 4589.45,2352.6 4629.13,2392.28 4749.13,2512.28 4869.13,2632.28 4989.13,2752.28 5109.13,2872.28 5229.13,2992.28 5349.13,3112.28 5469.13,3232.28 5589.13,3352.28 5709.13,3472.28 ; 4589.45,2412.6 4689.13,2512.28 4809.13,2632.28 4929.13,2752.28 5049.13,2872.28 5169.13,2992.28 5289.13,3112.28 5409.13,3232.28 5529.13,3352.28 5649.13,3472.28 5709.13,3532.28 ; 4589.45,2472.6 4629.13,2512.28 4749.13,2632.28 4869.13,2752.28 4989.13,2872.28 5109.13,2992.28 5229.13,3112.28 5349.13,3232.28 5469.13,3352.28 5589.13,3472.28 5709.13,3592.28 ; 4589.45,2532.6 4689.13,2632.28 4809.13,2752.28 4929.13,2872.28 5049.13,2992.28 5169.13,3112.28 5289.13,3232.28 5409.13,3352.28 5529.13,3472.28 5649.13,3592.28 ; 4589.45,2592.6 4629.13,2632.28 4749.13,2752.28 4869.13,2872.28 4989.13,2992.28 5109.13,3112.28 5229.13,3232.28 5349.13,3352.28 5469.13,3472.28 5589.13,3592.28 ; 4589.45,2652.6 4689.13,2752.28 4809.13,2872.28 4929.13,2992.28 5049.13,3112.28 5169.13,3232.28 5289.13,3352.28 5409.13,3472.28 5529.13,3592.28 ; 4589.45,2712.6 4629.13,2752.28 4749.13,2872.28 4869.13,2992.28 4989.13,3112.28 5109.13,3232.28 5229.13,3352.28 5349.13,3472.28 5469.13,3592.28 ; 4589.45,2772.6 4689.13,2872.28 4809.13,2992.28 4929.13,3112.28 5049.13,3232.28 5169.13,3352.28 5289.13,3472.28 5409.13,3592.28 ; 4589.45,2832.6 4629.13,2872.28 4749.13,2992.28 4869.13,3112.28 4989.13,3232.28 5109.13,3352.28 5229.13,3472.28 5349.13,3592.28 ; 4589.45,2892.6 4689.13,2992.28 4809.13,3112.28 4929.13,3232.28 5049.13,3352.28 5169.13,3472.28 5289.13,3592.28 ; 4589.45,2952.6 4629.13,2992.28 4749.13,3112.28 4869.13,3232.28 4989.13,3352.28 5109.13,3472.28 5229.13,3592.28 ; 4589.45,3012.6 4689.13,3112.28 4809.13,3232.28 4929.13,3352.28 5049.13,3472.28 5169.13,3592.28 ; 4589.45,3072.6 4629.13,3112.28 4749.13,3232.28 4869.13,3352.28 4989.13,3472.28 5109.13,3592.28 ; 4589.45,3132.6 4689.13,3232.28 4809.13,3352.28 4929.13,3472.28 5049.13,3592.28 ; 4589.45,3192.6 4629.13,3232.28 4749.13,3352.28 4869.13,3472.28 4989.13,3592.28 ; 4589.45,3252.6 4689.13,3352.28 4809.13,3472.28 4929.13,3592.28 ; 4589.45,3312.6 4629.13,3352.28 4749.13,3472.28 4869.13,3592.28 ; 4589.45,3372.6 4689.13,3472.28 4809.13,3592.28 ; 4589.45,3432.6 4629.13,3472.28 4749.13,3592.28 ; 4589.45,3492.6 4689.13,3592.28 ; 4589.45,3552.6 4629.13,3592.28 ; 4629.13,2272.28 4749.13,2392.28 4869.13,2512.28 4989.13,2632.28 5109.13,2752.28 5229.13,2872.28 5349.13,2992.28 5469.13,3112.28 5589.13,3232.28 5709.13,3352.28 ; 4689.13,2272.28 4809.13,2392.28 4929.13,2512.28 5049.13,2632.28 5169.13,2752.28 5289.13,2872.28 5409.13,2992.28 5529.13,3112.28 5649.13,3232.28 5709.13,3292.28 ; 4749.13,2272.28 4869.13,2392.28 4989.13,2512.28 5109.13,2632.28 5229.13,2752.28 5349.13,2872.28 5469.13,2992.28 5589.13,3112.28 5709.13,3232.28 ; 4809.13,2272.28 4929.13,2392.28 5049.13,2512.28 5169.13,2632.28 5289.13,2752.28 5409.13,2872.28 5529.13,2992.28 5649.13,3112.28 5709.13,3172.28 ; 4869.13,2272.28 4989.13,2392.28 5109.13,2512.28 5229.13,2632.28 5349.13,2752.28 5469.13,2872.28 5589.13,2992.28 5709.13,3112.28 ; 4929.13,2272.28 5049.13,2392.28 5169.13,2512.28 5289.13,2632.28 5409.13,2752.28 5529.13,2872.28 5649.13,2992.28 5709.13,3052.28 ; 4989.13,2272.28 5109.13,2392.28 5229.13,2512.28 5349.13,2632.28 5469.13,2752.28 5589.13,2872.28 5709.13,2992.28 ; 5049.13,2272.28 5169.13,2392.28 5289.13,2512.28 5409.13,2632.28 5529.13,2752.28 5649.13,2872.28 5709.13,2932.28 ; 5109.13,2272.28 5229.13,2392.28 5349.13,2512.28 5469.13,2632.28 5589.13,2752.28 5709.13,2872.28 ; 5169.13,2272.28 5289.13,2392.28 5409.13,2512.28 5529.13,2632.28 5649.13,2752.28 5709.13,2812.28 ; 5229.13,2272.28 5349.13,2392.28 5469.13,2512.28 5589.13,2632.28 5709.13,2752.28 ; 5289.13,2272.28 5409.13,2392.28 5529.13,2512.28 5649.13,2632.28 5709.13,2692.28 ; 5349.13,2272.28 5469.13,2392.28 5589.13,2512.28 5709.13,2632.28 ; 5409.13,2272.28 5529.13,2392.28 5649.13,2512.28 5709.13,2572.28 ; 5469.13,2272.28 5589.13,2392.28 5709.13,2512.28 ; 5529.13,2272.28 5649.13,2392.28 5709.13,2452.28 ; 5589.13,2272.28 5709.13,2392.28 ; 5649.13,2272.28 5709.13,2332.28
  Top Layer w15: 1170.33,2392.28 1580.24,2392.28 2509.99,2392.28 3369.75,2392.28 4019.59,2392.28 4589.45,2392.28 5709.13,2392.28 ; 1170.33,2512.28 1580.24,2512.28 2509.99,2512.28 3369.75,2512.28 4019.59,2512.28 4589.45,2512.28 5709.13,2512.28 ; 1170.33,2632.28 1580.24,2632.28 2509.99,2632.28 3369.75,2632.28 4019.59,2632.28 4589.45,2632.28 5709.13,2632.28 ; 1170.33,2752.28 1580.24,2752.28 2509.99,2752.28 3369.75,2752.28 4019.59,2752.28 4589.45,2752.28 5709.13,2752.28 ; 1170.33,2872.28 1580.24,2872.28 2509.99,2872.28 3369.75,2872.28 4019.59,2872.28 4589.45,2872.28 5709.13,2872.28 ; 1170.33,2992.28 1580.24,2992.28 2509.99,2992.28 3369.75,2992.28 4019.59,2992.28 4589.45,2992.28 5709.13,2992.28 ; 1170.33,3112.28 1580.24,3112.28 2509.99,3112.28 3369.75,3112.28 4019.59,3112.28 4589.45,3112.28 5709.13,3112.28 ; 1170.33,3232.28 1580.24,3232.28 2509.99,3232.28 3369.75,3232.28 4019.59,3232.28 4589.45,3232.28 5709.13,3232.28 ; 1170.33,3352.28 1580.24,3352.28 2509.99,3352.28 3369.75,3352.28 4019.59,3352.28 4589.45,3352.28 5709.13,3352.28 ; 1170.33,3472.28 1580.24,3472.28 2509.99,3472.28 3369.75,3472.28 4019.59,3472.28 4589.45,3472.28 5709.13,3472.28 ; 1170.33,3592.28 5709.13,3592.28 ; 1580.24,3712.28 1580.24,2272.28 ; 2509.99,3712.28 2509.99,2272.28 ; 3369.75,3712.28 3369.75,2272.28 ; 4019.59,3712.28 4019.59,2272.28 ; 4589.45,3712.28 4589.45,2272.28 ; 1580.24,2272.28 2509.99,2272.28 ; 1580.24,2272.28 1170.33,2272.28 1170.33,3712.28 5709.13,3712.28 5709.13,2272.28 4589.45,2272.28 ; 2509.99,2272.28 3369.75,2272.28 ; 3369.75,2272.28 4019.59,2272.28 ; 4019.59,2272.28 4589.45,2272.28

## Polygon pours and split planes (outlines as drawn)
GND on MidPlane_1 (split plane): 4192.5,4075.21 3634.27,4075.21 3634.27,4124.02 3634.27,4125.58 3634.13,4126.99 3633.88,4129.5 3632.74,4133.27 3631.54,4136.17 3630.48,4138.14 3629.68,4139.64 3629.25,4140.17 3627.18,4142.69 3624.97,4144.9 3622.97,4146.54 3621.92,4147.4 3620.43,4148.2 3618.45,4149.26 3615.55,4150.46 3612.9,4151.26 3611.78,4151.6 3609.27,4151.85 3607.86,4151.99 3587.01,4151.99 3585.61,4151.85 3583.09,4151.6 3579.32,4150.46 3576.43,4149.26 3574.45,4148.2 3572.96,4147.4 3572.43,4146.97 3569.91,4144.9 3567.7,4142.69 3565.74,4140.31 3565.2,4139.64 3563.58,4136.61 3563.34,4136.17 3562.14,4133.27 3561.69,4131.79 3561,4129.5 3560.61,4125.58 3560.61,4124.02 3560.61,4075.21 3447.26,4075.21 3447.26,4124.02 3447.26,4125.58 3447.12,4126.99 3446.87,4129.5 3445.73,4133.27 3444.53,4136.17 3443.47,4138.14 3442.67,4139.64 3442.24,4140.17 3440.18,4142.69 3437.96,4144.9 3435.96,4146.54 3434.92,4147.4 3434.91,4147.4 3433.42,4148.2 3431.44,4149.26 3428.55,4150.46 3425.9,4151.26 3424.78,4151.6 3422.26,4151.85 3420.86,4151.99 3400.01,4151.99 3398.6,4151.85 3396.09,4151.6 3392.32,4150.46 3389.42,4149.26 3387.44,4148.2 3385.95,4147.4 3385.42,4146.97 3382.9,4144.9 3380.69,4142.69 3378.73,4140.31 3378.19,4139.64 3376.57,4136.61 3376.33,4136.17 3375.13,4133.27 3374.68,4131.79 3373.99,4129.5 3373.6,4125.58 3373.6,4124.02 3373.6,4075.21 1358.68,4075.21 1358.68,4743.68 4192.5,4743.68
GND on MidPlane_2 (split plane): 4192.5,4075.21 3634.27,4075.21 3634.27,4124.02 3634.27,4125.58 3634.13,4126.99 3633.88,4129.5 3632.74,4133.27 3631.54,4136.17 3630.48,4138.14 3629.68,4139.64 3629.25,4140.17 3627.18,4142.69 3624.97,4144.9 3622.97,4146.54 3621.92,4147.4 3620.43,4148.2 3618.45,4149.26 3615.55,4150.46 3612.9,4151.26 3611.78,4151.6 3609.27,4151.85 3607.86,4151.99 3587.01,4151.99 3585.61,4151.85 3583.09,4151.6 3579.32,4150.46 3576.43,4149.26 3574.45,4148.2 3572.96,4147.4 3572.43,4146.97 3569.91,4144.9 3567.7,4142.69 3565.74,4140.31 3565.2,4139.64 3563.58,4136.61 3563.34,4136.17 3562.14,4133.27 3561.69,4131.79 3561,4129.5 3560.61,4125.58 3560.61,4124.02 3560.61,4075.21 3447.26,4075.21 3447.26,4124.02 3447.26,4125.58 3447.12,4126.99 3446.87,4129.5 3445.73,4133.27 3444.53,4136.17 3443.47,4138.14 3442.67,4139.64 3442.24,4140.17 3440.18,4142.69 3437.96,4144.9 3435.96,4146.54 3434.92,4147.4 3434.91,4147.4 3433.42,4148.2 3431.44,4149.26 3428.55,4150.46 3425.9,4151.26 3424.78,4151.6 3422.26,4151.85 3420.86,4151.99 3405.1,4151.99 3405.1,4354.59 3527.23,4476.71 3528.33,4478.36 3528.72,4480.31 3528.72,4743.68 4192.5,4743.68
P3V3 on MidPlane_2 (split plane): 3518.52,4482.43 3396.4,4360.3 3395.3,4358.65 3394.91,4356.7 3394.91,4151.24 3392.32,4150.46 3389.42,4149.26 3387.44,4148.2 3385.95,4147.4 3385.42,4146.97 3382.9,4144.9 3380.69,4142.69 3378.73,4140.31 3378.19,4139.64 3376.57,4136.61 3376.33,4136.17 3375.13,4133.27 3374.68,4131.79 3373.99,4129.5 3373.6,4125.58 3373.6,4124.02 3373.6,4075.21 1358.68,4075.21 1358.68,4743.68 3518.52,4743.68

## Other copper
Top Layer:
  text "Layer" at 1230.33,3622.28 h60
  text "Name" at 1640.24,3622.28 h60
  text "Material" at 2569.99,3622.28 h60
  text "Thickness" at 3429.75,3622.28 h60
  text "Constant" at 4079.59,3622.28 h60
  text "Board Layer Stack" at 4649.45,3622.28 h60
  text "1" at 1230.33,3502.28 h60
  text "Top Overlay" at 1640.24,3502.28 h60
  text "2" at 1230.33,3382.28 h60
  text "Top Solder" at 1640.24,3382.28 h60
  text "Solder Resist" at 2569.99,3382.28 h60
  text "0.40mil" at 3429.75,3382.28 h60
  text "3.5" at 4079.59,3382.28 h60
  text "3" at 1230.33,3262.28 h60
  text "Top Layer" at 1640.24,3262.28 h60
  text "Copper" at 2569.99,3262.28 h60
  text "1.40mil" at 3429.75,3262.28 h60
  text "4" at 1230.33,3142.28 h60
  text "Dielectric1" at 1640.24,3142.28 h60
  text "FR-4" at 2569.99,3142.28 h60
  text "14.17mil" at 3429.75,3142.28 h60
  text "4.8" at 4079.59,3142.28 h60
  text "5" at 1230.33,3022.28 h60
  text "MidPlane_1" at 1640.24,3022.28 h60
  text "Copper" at 2569.99,3022.28 h60
  text "1.40mil" at 3429.75,3022.28 h60
  text "6" at 1230.33,2902.28 h60
  text "Dielectric3" at 1640.24,2902.28 h60
  text "FR-4" at 2569.99,2902.28 h60
  text "27.95mil" at 3429.75,2902.28 h60
  text "4.8" at 4079.59,2902.28 h60
  text "7" at 1230.33,2782.28 h60
  text "MidPlane_2" at 1640.24,2782.28 h60
  text "Copper" at 2569.99,2782.28 h60
  text "1.40mil" at 3429.75,2782.28 h60
  text "8" at 1230.33,2662.28 h60
  text "Dielectric2" at 1640.24,2662.28 h60
  text "FR-4" at 2569.99,2662.28 h60
  text "14.17mil" at 3429.75,2662.28 h60
  text "4.8" at 4079.59,2662.28 h60
  text "9" at 1230.33,2542.28 h60
  text "Bottom Layer" at 1640.24,2542.28 h60
  text "Copper" at 2569.99,2542.28 h60
  text "1.40mil" at 3429.75,2542.28 h60
  text "10" at 1230.33,2422.28 h60
  text "Bottom Solder" at 1640.24,2422.28 h60
  text "Solder Resist" at 2569.99,2422.28 h60
  text "0.40mil" at 3429.75,2422.28 h60
  text "3.5" at 4079.59,2422.28 h60
  text "11" at 1230.33,2302.28 h60
  text "Bottom Overlay" at 1640.24,2302.28 h60
Bottom Layer:
  rectangle net P3V3: 3267.72,4618.11 3370.08,4712.6
  rectangle net P3V3: 3290.35,4535.17 3421.26,4586.61
  rectangle net NetC1_2: 2765.75,4377.95 2814.96,4397.64
  rectangle net NetC3_2: 2736.22,4411.42 2807.09,4429.13
  rectangle net P3V3: 2627.95,4360.24 2687.01,4399.61
MidPlane_2 (plane layer: these items are gaps in the copper):
  lines w10: 3400.01,4143.7 3400.01,4356.7 3523.62,4480.31 3523.62,4759.84 3515.75,4767.72

## Silkscreen, mask and mechanical layers (free items; w line width, h text height)
Bottom Overlay:
  text "FAULT" at 1492.13,4614.17 h30
  text "DIS" at 2208.66,4578.74 h30
  text "PRESENT" at 1559.06,4448.82 h30
  text "DEF2" at 2244.09,4389.76 h30
  text "DEF1" at 2244.09,4291.34 h30
  text "LOS" at 1527.56,4251.97 h30
  text "RATE" at 2181.1,4185.04 h30
Outline:
  the board outline again, w10
Dimensions:
  lines w5: 1046.41,4317.42 1062.41,4317.42 ; 1046.41,4365.42 1054.41,4377.42 1054.41,4317.42 ; 1088.31,4326.42 1092.31,4321.42 1097.01,4318.42 1103.01,4317.42 1109.01,4319.42 1113.61,4323.42 1117.01,4330.42 1117.61,4338.42 1116.31,4346.42 1113.01,4351.42 1108.31,4355.42 1103.61,4356.42 1099.01,4355.42 1093.01,4351.42 1095.01,4377.42 1113.01,4377.42

## Text inside footprints (layer, text, board x,y; h text height)
Cage1: Drill Drawing "PRESS-FIT TECHNOLOGY" at 1572.83,4328.74 h39.37; Drill Drawing "10x diam. 1.05mm +/-0.05" at 1462.6,4502.95 h39.37; Drill Drawing "9x diam. 0.95mm +/-0.05" at 1486.22,4415.35 h39.37; Drill Drawing "1x diam. 0.85mm +/-0.05" at 1494.09,4576.77 h39.37
J3: Drill Drawing "0.85" at 3563.07,3948.2 h39.37; Drill Drawing "1.87" at 3518.08,4050.74 h39.37 r270; Drill Drawing "r0.2" at 3413.39,4169.29 h39.37; Mechanical 8 "PCB end" at 3673.23,4020.67 h19.68
SW1: Bottom Overlay "1" at 1975.39,4604.33 h39.37 r90; Mechanical 14 "1" at 1975.39,4604.33 h39.37 r90